# Altium PCB CHUVEIRO ECOLOGICO.PcbDoc
Units mil, origin at the board's own origin, x right, y up, seen from the top; angles counter-clockwise.
Board outline 3795 x 2780 mil, 2 copper layers (Top Layer, Bottom Layer); 36 components, 29 nets, 138 pads, 0 vias.
Unrouted connection lines stored in the file: 7.
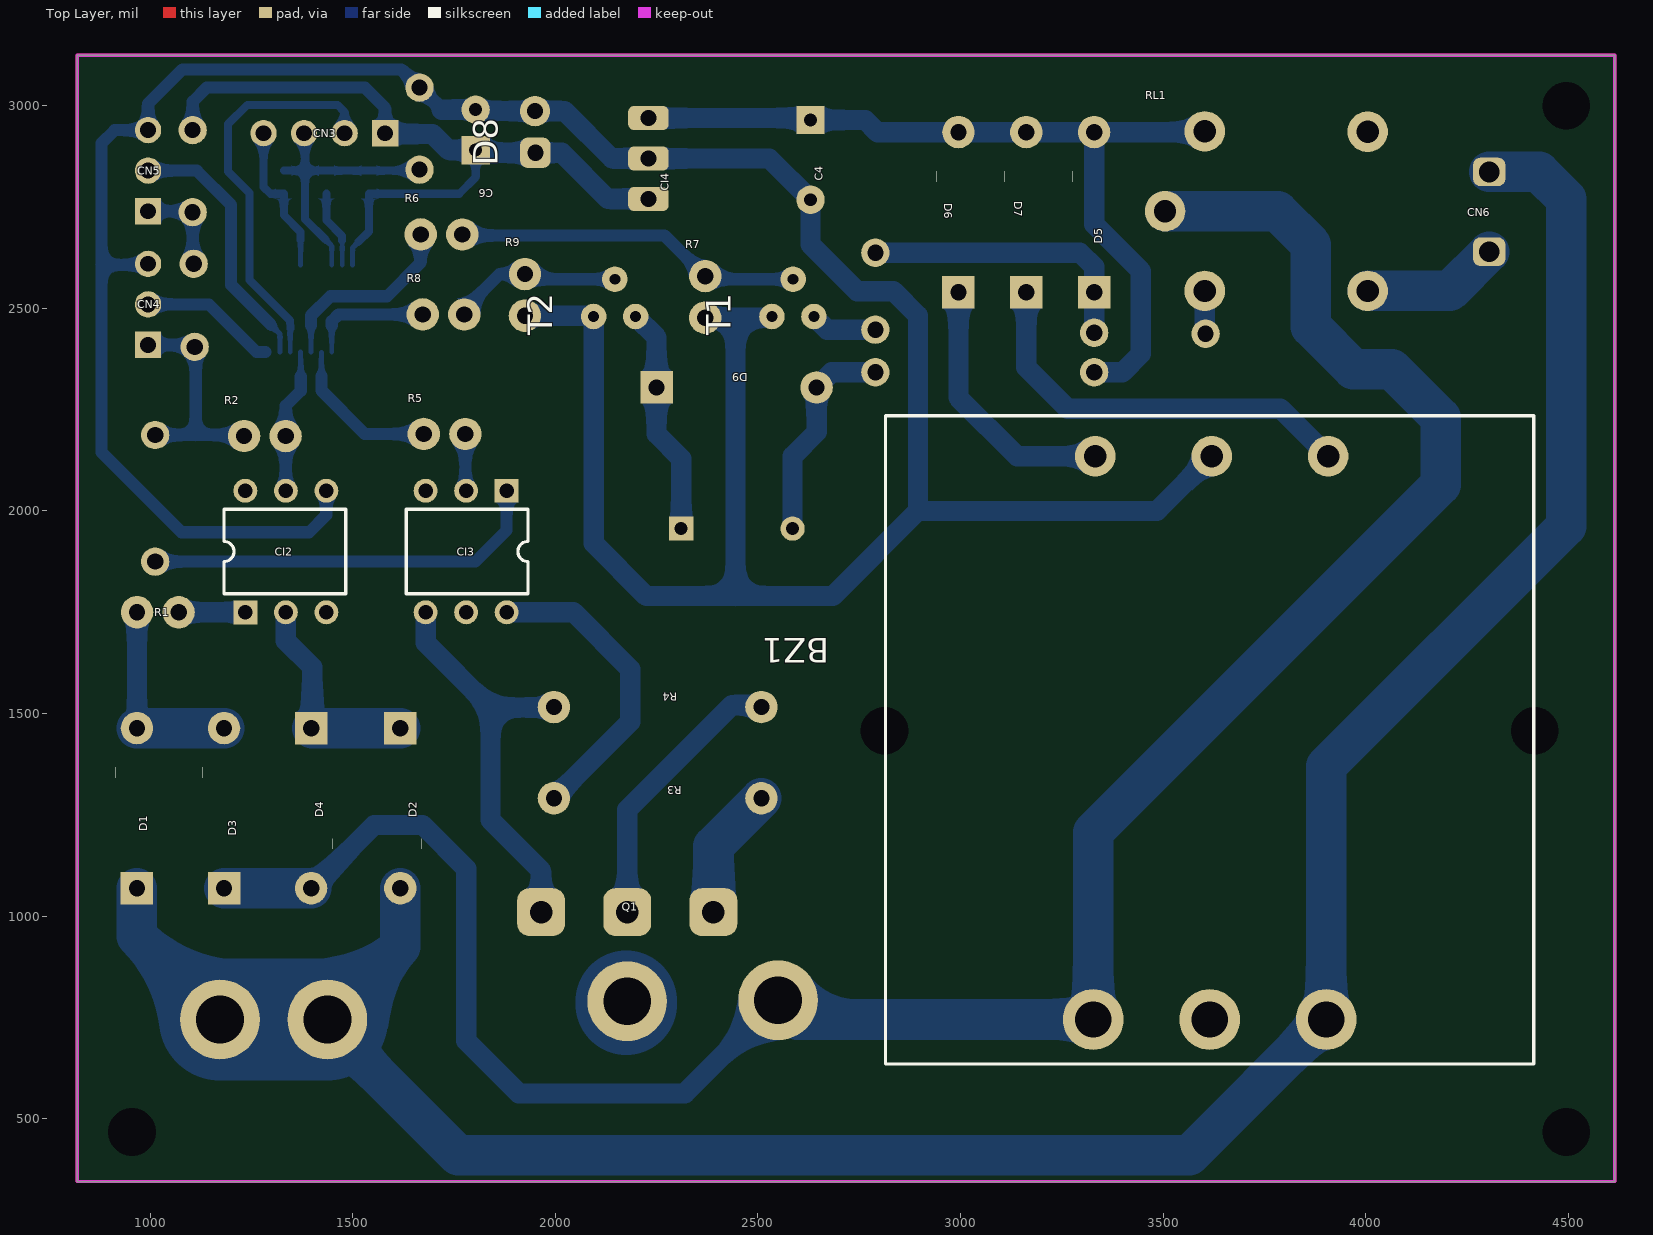
[diagram p0: Top Layer view]
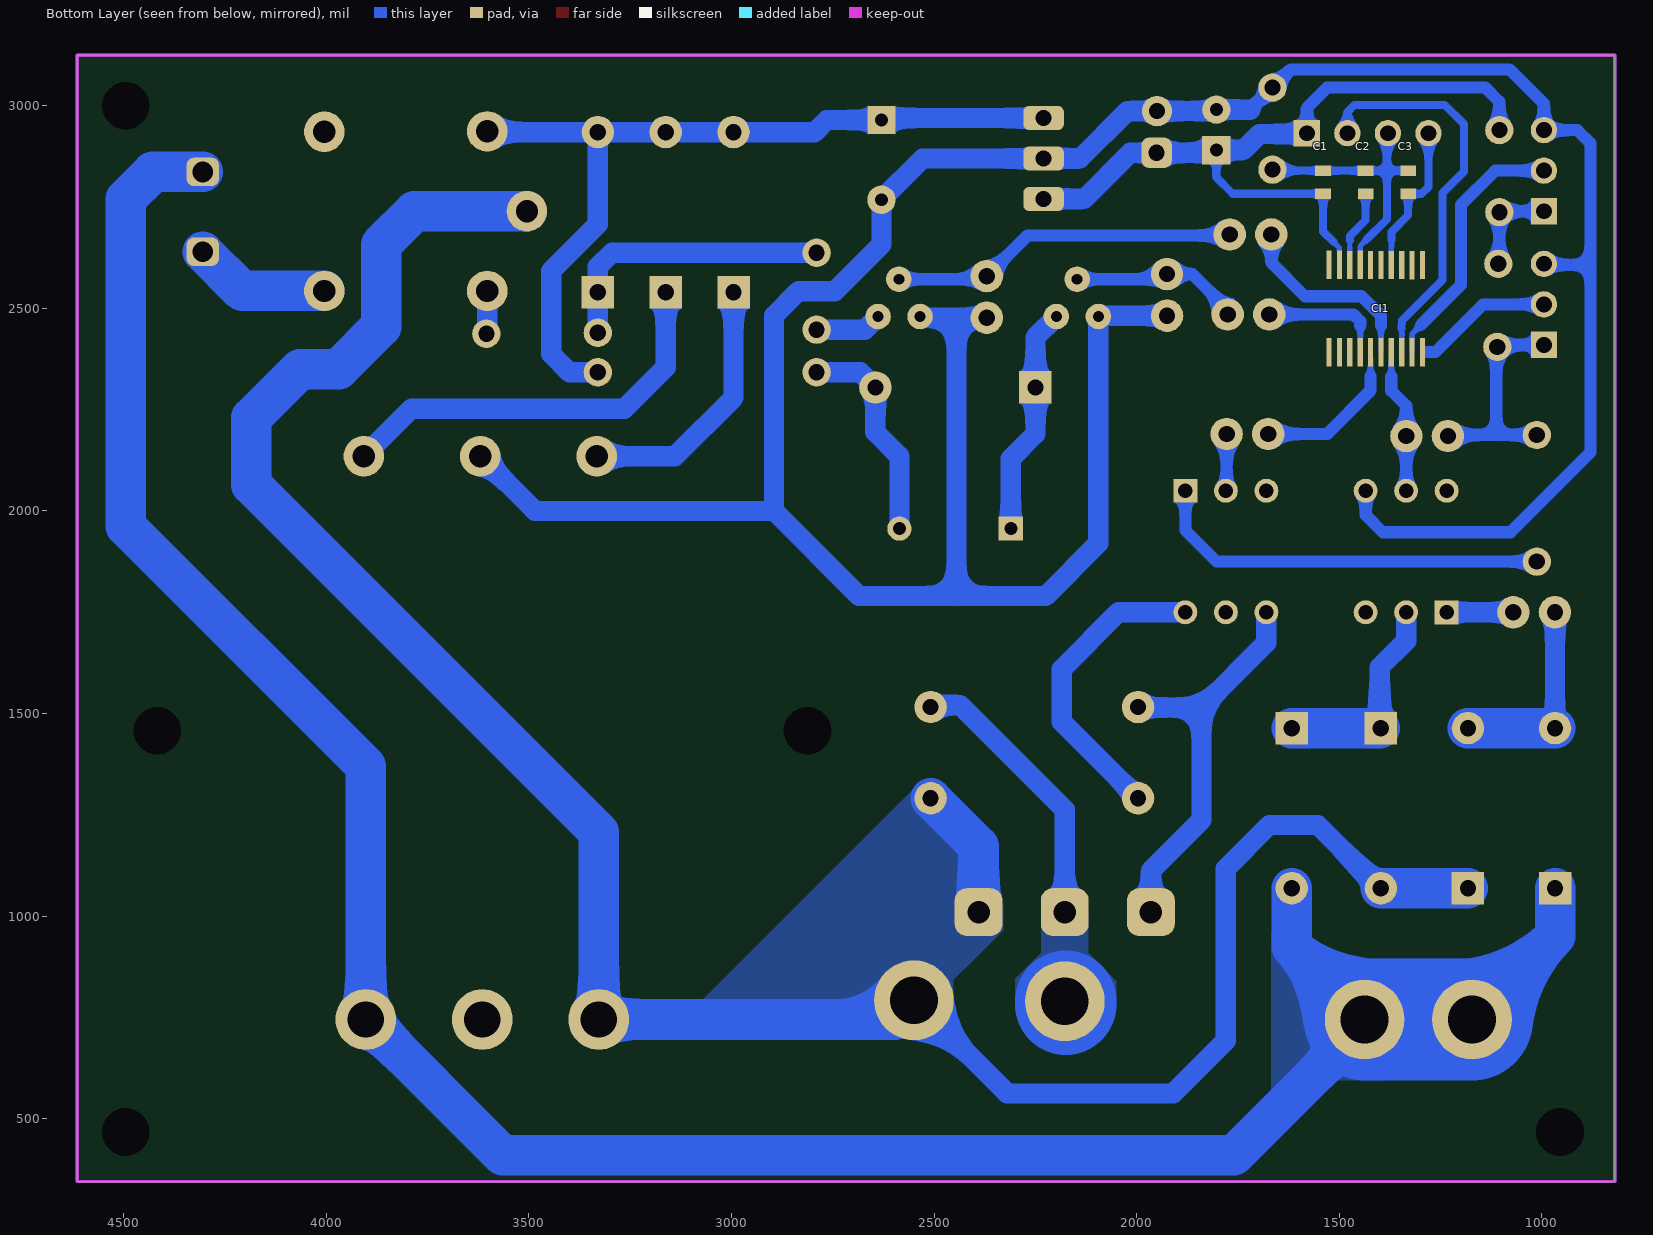
[diagram p1: Bottom Layer view, seen from below]
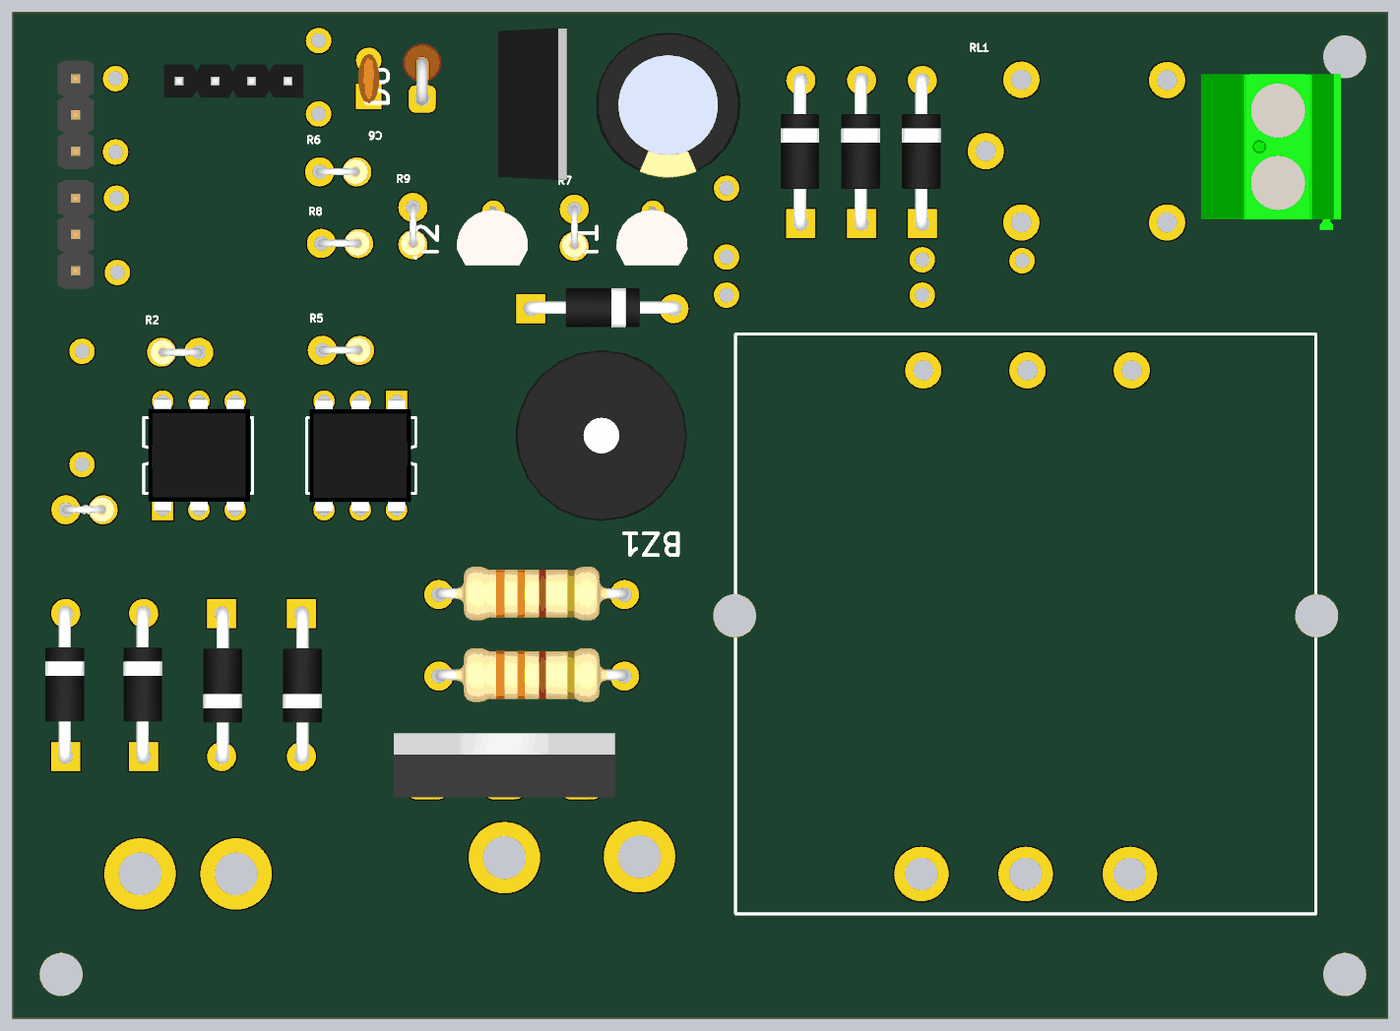
[diagram p2: 3D render of the assembled board from above, using the file's embedded part models]
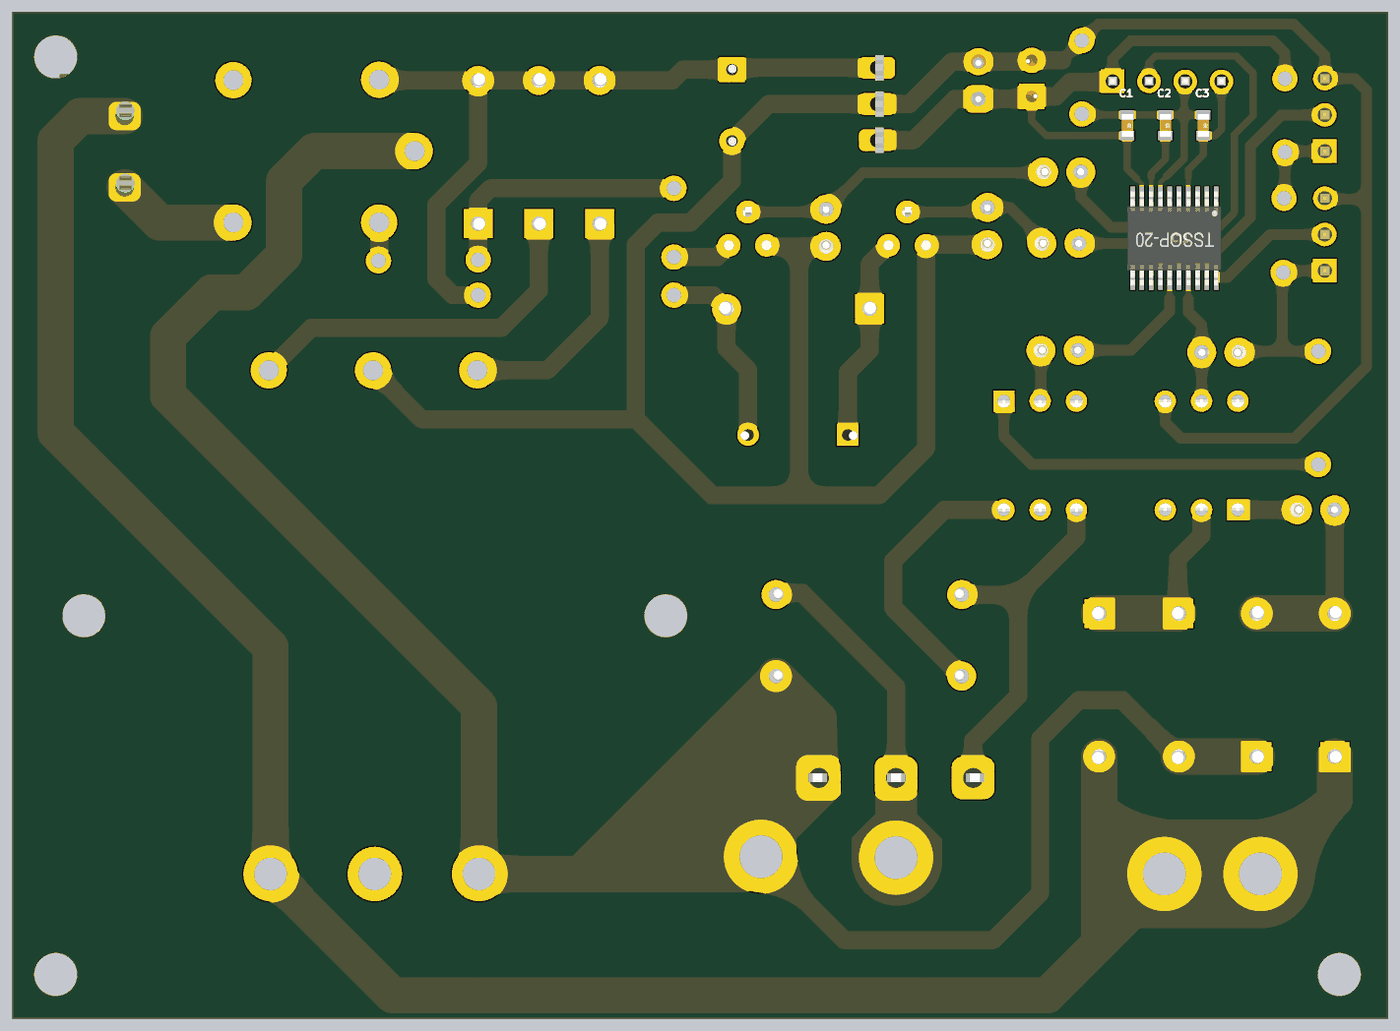
[diagram p3: 3D render of the assembled board from below, using the file's embedded part models]

## Layer stack, top to bottom
Top Layer: signal copper 1.4
Dielectric: dielectric 12.6, FR-4, Dk 4.8
Bottom Layer: signal copper 1.4

## Board outline
4195,3125 4615,3125 4615,345 820,345 820,3125

## Design rules (kind name [scope] priority, off if disabled: settings)
Clearance [All] p1: gap=10
PolygonConnect PolygonConnect_4 [All vs IsNamedPolygon('Top Layer-No Net')] p1: connectstyle=Direct reliefconductorwidth=10 reliefentries=4 polygonreliefangle="90 Angle"
PolygonConnect PolygonConnect_3 [All vs IsNamedPolygon('Top Layer-No Net')] p2: connectstyle=Direct reliefconductorwidth=10 reliefentries=4 polygonreliefangle="90 Angle"
PolygonConnect PolygonConnect_2 [All vs IsNamedPolygon('Top Layer-No Net')] p3: connectstyle=Direct reliefconductorwidth=10 reliefentries=4 polygonreliefangle="90 Angle"
PolygonConnect PolygonConnect_1 [All vs IsNamedPolygon('Top Layer-No Net')] p4: connectstyle=Direct reliefconductorwidth=10 reliefentries=4 polygonreliefangle="90 Angle"
PolygonConnect [All] p5: connectstyle=Relief reliefconductorwidth=10 reliefentries=4 polygonreliefangle="90 Angle"
RoutingVias [All] p1: holewidth=28 width=50 viastyle="Through Hole" minholewidth=28 minwidth=50 maxholewidth=28 maxwidth=50
SilkscreenOverComponentPads SilkToSolderMaskClearance [IsPad] p1: minsilkscreentomaskgap=10
SolderMaskExpansion [All] p1: expansion=4
Width [All] p1: maxlimit=300 minlimit=10 preferedwidth=12 minimp=50.000000 maximp=50.000000 favimp=50.000000
27 further rules are at their usual default settings.

## Components (designator, comment, footprint, x,y, rotation, side; value= is the part's Value field where it differs from the comment)
BZ1 "TDYY12-06" "BUZZER 12mm" 2310,1955 r180 top
C1 "C0603" C0603 1540,2840 r270 bottom
C2 "C0603" C0603 1435,2840 r270 bottom
C3 "C0603" C0603 1330,2840 r270 bottom
C4 "C_ELET_D10P5H20" C_ELET_D10P5H20 2630,2965 r90 top
C6 "C_ELET_2200uF" C_CERAMICO 1805,2890 r270 top
CI1 "CI_STM8S003F3_TSSOP20" TSSOP20 1410,2500 r270 bottom
CI2 "CI_4N25_DIL6" DIP6 1235,1750 r90 top
CI3 "CI_MOC3040_DIL6" DIP6 1880,2050 r270 top
CI4 "7805" CI_7805_TO220_V 2230,2970 r270 top
CN3 "CON_BP1X4_180" CON_BP1X4_180 1580,2932.5 r180 top
CN4 "CON_BP1X3_180" CON_BP1X3_180 995,2410 r90 top
CN5 "CON_BP1X3_180" CON_BP1X3_180 995,2740 r90 top
CN6 "CON_KRE_1X2" KRE_1X2 4305,2640 r90 top
D1 "1N400X" DO-35_1 967.5,1069 r90 top
D2 "1N400X" DO-35_1 1617.5,1464 r270 top
D3 "1N400X" DO-35_1 1182.5,1069 r90 top
D4 "1N400X" DO-35_1 1397.5,1464 r270 top
D5 "1N400X" DO-35_1 3330,2540 r90 top
D6 "1N400X" DO-35_1 2995,2540 r90 top
D7 "1N400X" DO-35_1 3162.5,2540 r90 top
D8 "DZ_1W_DO41" ZENNER_PE_4 1950,2890 r90 top
D9 "1N400X" DO-35_1 2250,2305 r0 top
Q1 "BT151" TOP-3 1965,1010 r0 top
R1 "R_CR25_1W" RES.5/1W_PE_2 967.5,1750 r90 top
R2 "R_CR25_1W" RES.5/1W_PE_2 1335,2185 r270 top
R3 "RES_1/4W_DIP" "RES 1/4W 330R" 2252.6,1290 r180 top
R4 "RES_1/4W_DIP" "RES 1/4W 330R" 2252.6,1515 r180 top
R5 "R_CR25_1W" RES.5/1W_PE_2 1675,2190 r90 top
R6 "R_CR25_1W" RES.5/1W_PE_2 1667.5,2682.5 r90 top
R7 "R_CR25_1W" RES.5/1W_PE_2 2370,2580 r0 top
R8 "R_CR25_1W" RES.5/1W_PE_2 1672.5,2485 r90 top
R9 "R_CR25_1W" RES.5/1W_PE_2 1925,2585 r0 top
RL1 "REL_NF_20A" REL_NF 3605,2540 r90 top
T1 "T_BC548" TO92_78L05 2515,2495 r90 top
T2 "T_BC548" TO92_78L05 2075,2495 r90 top

## Footprints (in the part's own frame and the unit in brackets; to place one, negate y for a bottom-side part, rotate by r counter-clockwise, add the part's x,y. Pads: shape width x height; smd on the part's side, far side on the other; paste and mask are expansions set on the pad)
"BUZZER 12mm" [mil] "BUZZER d12mm h10mm p7,5mm - TDYY12-06"
  round 60 hole 32: 1(-275.59,-1.62)
  rect 60x60 hole 32: 2(-0.66,-1.6)
  body extent -371,-236 101,236, height 472
C0603 [mil]
  rect 26x39 smd: 1(0,0) 2(57.05,0.02)
  body extent -3,-15 60,16, height 12
C_CERAMICO [mil]
  round 70 hole 32: 1(-100.61,-1.62)
  rect 70x70 hole 32: 2(-0.66,-1.6)
  body extent -119,-31 19,28, height 217
C_ELET_D10P5H20 [mil]
  round 70 hole 32: 1(-196.85,0)
  rect 70x70 hole 32: 2(0,0)
  body extent -298,-199 102,201, height 800
CI_7805_TO220_V [mil]
  rrect50% 60x100 hole 39: 1(0,-0.04) 2(200,-0.04) 3(100,-0.04)
  body extent -110,-70 310,120, height 837
CON_BP1X3_180 [mil]
  rect 65x65 hole 39: 1(0,0)
  round 65 hole 39: 2(100,0) 3(200,0)
  body extent -50,-50 250,50, height 326
CON_BP1X4_180 [mil]
  rect 65x65 hole 39: 1(0,0)
  round 65 hole 39: 2(100,0) 3(200,0) 4(300,0)
  body extent -42,-47 342,45, height 320
DIP6 [mm]
  rect 1.5x1.5 hole 0.9: 1(0,0)
  round 1.5 hole 0.9: 2(0,-2.54) 3(0,-5.08) 4(7.62,-5.08) 5(7.62,-2.54) 6(7.62,0)
  silkscreen extent 1.16,-6.3 6.46,1.34, body extent -0.1,-6.1 7.77,1.02, height 5.3
DO-35_1 [mil]
  rect 80x80 hole 40: 1(0,0)
  round 80 hole 40: 2(395,0)
  silkscreen extent 273,53 298,53, body extent -18,-51 416,56, height 107
KRE_1X2 [mil]
  rrect50% 70x80 hole 51.18: 1(0,0) 2(196.85,0)
  body extent -117,-179 312,207, height 559
REL_NF [mil]
  round 100 hole 55.12: 1(3,2) 2(397,2) 3(200,100) 4(395.98,-400) 5(3,-400)
  body extent -44,-464 444,146, height 551
"RES 1/4W 330R" [mil]
  round 80 hole 40: 1(-256.02,-1.06) 2(256.02,-1.04)
  body extent -265,-78 265,70, height 369
RES.5/1W_PE_2 [mil]
  round 80 hole 40: 1(0,-102.99) 2(0.2,-0.4)
  body extent -35,-135 36,9, height 262
TO92_78L05 [mm]
  round 1.6 hole 0.686: 1(-0.382,-3.132) 2(-0.381,-0.5) 3(1.956,-1.829)
  body extent -1.78,-4.26 2.33,0.74, height 11.5
TOP-3 [mm]
  rrect50% 3x3 hole 1.4: 1(0,0) 2(5.4,0) 3(10.8,0)
  body extent -2.37,-1.38 13.13,3.12, height 22.9
TSSOP20 [mil]
  rect 70x13 smd: 1(-106.97,115.16) 2(-106.94,89.56) 3(-106.97,63.98) 4(-107,38.39) 5(-107.25,12.8) 6(-107.04,-12.8) 7(-107.39,-38.39) 8(-107,-64.1) 9(-107.39,-89.69) 10(-107.39,-115.16) 11(107.96,-115.16) 12(107.96,-89.68) 13(108.36,-64.09) 14(107.96,-38.39) 15(108.04,-12.8) 16(108.02,12.8) 17(107.96,38.39) 18(107.93,63.98) 19(107.93,89.57) 20(108.01,115.14)
  body extent -129,-130 131,130, height 47
ZENNER_PE_4 [mil]
  rrect50% 75x75 hole 40: 1(-5.94,-0.85)
  round 75 hole 40: 2(97,0)
  body extent -22,-53 146,52, height 291

## Part data
BZ1: library part BZ_TDYY12-06, "BUZZER d12mm h10mm p7,5mm"
C1 C2 C3 CN3: "Capacitor"
C4: "Radial Polarized Capacitor"
C6: library part C_CERAMICO_
CI4: library part CI_7805_TO220_V
CN6: "Boardmount Pin Connector"
D1 D2 D3 D4 D5 D6 D7 D8 D9 R1 R2 R5 R6 R7 R8 R9: "Diode"
Q1: library part Q_BTA24-600B, "TRIAC"
R3 R4: library part "RES 1/4W 330R", "Resistor"
RL1: "RELE SIMPLES REVERSOR 20A"
T1 T2: "NPN Transistor"

## Free pads (board coordinates)
  round 196.85 hole 118.11: 0(1172.5,745) 0(1437.5,745) 0(2177.5,790) 0(2550,792.5)
  round 70 hole 40: 2(1012.5,1875) 2(1012.5,2187.5) 2(1105,2737.5) 2(1105,2940) 2(1107.5,2610) 2(1110,2405) 2(1665,2842.5) 2(1665,3045) 4(2790,2342.5) 4(2790,2447.5) 4(2790,2637.5) 4(3330,2342.5) 4(3330,2440) 4(3605,2437.5)
  round 100 hole 55: 2(3332.5,2135) 3(3907.5,2135) 4(3620,2135)
  round 150 hole 90: 2(3902.5,745) 3(3327.5,745) 4(3615,745)
  round 0 hole 118.11: 7(955,467.5) 7(2812.5,1457.5) 7(4417.5,1457.5) 7(4495,467.5) 7(4495,3000)

## Nets (pads, with @x,y where several pads share a name; then routed paths per layer and width w, separated by ;. In a path a pad name is that pad's centre, name@x,y a point inside that pad or via, vN(x,y) a via of type N, cw(c..) or ccw(c..) an arc to the next point about the centre after c; other vN are vias at no path point)
+5V_DIG: C1.2 C6.2 CI1.9 CI3.1 CI4.2 CN3.1 CN4.1 CN5.1 D8.1 pad.2@1012.5,1875 pad.2@1012.5,2187.5 pad.2@1105,2737.5 pad.2@1105,2940 pad.2@1107.5,2610 pad.2@1110,2405 R2.1 | length 3679.8
  Bottom Layer w12: CI1.9 1499.69,2649.69 1515,2665
  Bottom Layer w20: 1515,2665 1539.98,2689.98 C1.2 1762.95,2782.95 1803.4,2823.4 C6.2
  Bottom Layer w30: CN4.1 pad.2@1097.5,2410 ; CN5.1 1105,2740 pad.2@1105,2610 ; pad.2@1007.5,1875 1802.5,1875 1880,1952.5 CI3.1 ; pad.2@1012.5,2187.5 1112.5,2187.5 ; pad.2@1105,2940 1105,3010 1140,3045 1530,3045 1580,2995 CN3.1 ; pad.2@1112.5,2402.5 1112.5,2187.5 ; R2.1 1229.51,2187.5 1112.5,2187.5
  Bottom Layer w50: CN3.1 1581.89,2930.61 1696.89,2930.61 1736.84,2890.66 C6.2 1810.01,2884.06 D8.1 2015.94,2884.06 2130,2770 CI4.2
GND: 
GNDD: C1.1 C2.1 C3.1 C4.1 C6.1 CI1.7 CI2.4 CI4.3 CN3.3 CN4.3 CN5.3 D8.2 pad.2@1665,2842.5 pad.2@1665,3045 pad.4@3620,2135 R7.1 R9.1 T1.2 T2.2 | length 8491.6
  Bottom Layer w12: 1432.5,2670 1448.39,2654.11 CI1.7
  Bottom Layer w20: C3.1 1382.5,2840 ; CN3.3@1382.5,2932.5 1382.5,2840 ; 1432.5,2670 1382.5,2720 1382.5,2840 ; pad.2@1665,2842.5 1662.5,2840 C1.1 C2.1 1382.5,2840
  Bottom Layer w30: CN4.3@992.5,2607.5 880,2607.5 ; CI2.4 1435,1990 1392.5,1947.5 1077.5,1947.5 880,2145 880,2607.5 ; 1719.39,2990.61 1620,3090 1080,3090 995,3005 CN5.3 912.5,2940 880,2907.5 880,2607.5
  Bottom Layer w50: 1719.39,2990.61 C6.1 ; C6.1@1806.99,2987 D8.2 2023,2987 2140,2870 CI4.3 2528.15,2870 C4.1 2630,2657.5 2745,2542.5 2835,2542.5 2895,2482.5 2895,2000 ; R9.1 T2.2@2092.68,2482.01 ; T2.2 2094.68,1920.32 2225,1790 2445,1790 ; R7.1 2445,2477.01 ; T1.2@2531.69,2477.01 2445,2477.01 ; 3485,2000 2895,2000 ; 3490,2005 pad.4@3620,2135 ; 2445,1790 2685,1790 2895,2000 ; 2445,1790 2445,2477.01
NetBZ1_2: BZ1.2 D9.1 T2.1 | length 569.9
  Bottom Layer w50: T2.1 2250,2428.27 D9.1 2250,2190 2310.66,2129.34 BZ1.2
NetC2_2: C2.2 CI1.8 | length 192
  Bottom Layer w12: CI1.8 1474.1,2667.5
  Bottom Layer w20: C2.2 1434.98,2717.52 1473.69,2678.81 1473.69,2667.5
NetC3_2: C3.2 CI1.4 CN3.4 | length 382.7
  Bottom Layer w12: CI1.4 1371.61,2668.39
  Bottom Layer w20: CN3.4 1280,2800 1297.05,2782.95 C3.2 1329.98,2730.09 1371.61,2688.46 1371.61,2668.39
NetCI1_14: CI1.14 R8.2 | length 295.3
  Bottom Layer w12: CI1.14 1448.39,2457.5
  Bottom Layer w30: 1448.39,2457.5 1448.39,2468.39 1465.2,2485.2 R8.2@1660.4,2485.2
NetCI1_15: CI1.15 R5.2 | length 391.7
  Bottom Layer w12: 1422.8,2332.8 CI1.15
  Bottom Layer w30: 1422.8,2332.8 1422.8,2297.2 1529.8,2190.2 R5.2
NetCI1_16: CI1.16 R6.2 | length 487.2
  Bottom Layer w12: CI1.16 1397.2,2457.5
  Bottom Layer w30: 1397.2,2457.5 1397.2,2482.2 1445,2530 1585,2530 1667.5,2612.5 1667.5,2668.1 R6.2@1655.4,2680.2
NetCI1_17: CI1.17 CI2.5 R2.2 | length 357
  Bottom Layer w12: 1371.61,2331.61 CI1.17
  Bottom Layer w30: CI2.5@1334.6,2050.4 R2.2 1334.6,2259.6 1371.61,2296.61 1371.61,2331.61
NetCI1_18: CI1.18 CN3.2 | length 993
  Bottom Layer w12: CI1.18 1346.02,2450
  Bottom Layer w20: 1346.02,2450 1345,2470 1245,2570 1245,2785 1192.5,2837.5 1192.5,2955 1240,3002.5 1462.5,3002.5 1480,2985 CN3.2
NetCI1_19: CI1.19 CN5.2 | length 653.6
  Bottom Layer w12: 1297.5,2460 1320.43,2437.07 CI1.19 CI1.19@1320,2392.5
  Bottom Layer w30: CN5.2 1115,2840 1200,2755 1200,2557.5 1297.5,2460
NetCI1_20: CI1.20 CN4.2 | length 338.9
  Bottom Layer w30: CN4.2 1145,2510 1263.01,2391.99 1285,2391.99
NetCI2_1: CI2.1 R1.1 | length 164.5
  Bottom Layer w50: R1.1 CI2.1
NetCI2_2: CI2.2 D2.1 D4.1 | length 530.4
  Bottom Layer w50: CI2.2 1335,1680 1400,1615 D4.1@1400,1464
  Bottom Layer w100: D4.1@1400,1464 D2.1
NetCI3_2: CI3.2 R5.1 | length 138
  Bottom Layer w30: CI3.2@1777.99,2052.01 R5.1
NetCI3_4: CI3.4 Q1.1 R4.2 | length 1015.1
  Bottom Layer w50: CI3.4 1680,1675 1840,1515 ; Q1.1 1965,1112.5 1840,1237.5 1840,1515 ; R4.2 1995.54,1515 1840,1515
NetCI3_6: CI3.6 R3.2 | length 760
  Bottom Layer w50: CI3.6 2045,1750 2185,1610 2185,1479.46 R3.2
NetCN1_1: CN6.2 D1.1 D2.2 pad.0@1172.5,745 pad.0@1437.5,745 pad.2@3902.5,745 | length 6359.1
  Bottom Layer w50: pad.0@1437.5,667.57 pad.0@1442.5,672.57 ; pad.0@1442.5,667.57 pad.0@1467.5,692.57
  Bottom Layer w100: D1.1 967.5,950 pad.0@1172.5,745 ; D2.2 1617.5,925 1431.25,738.75 1760,410 3565,410 pad.2@3902.5,747.5 ; pad.2@3902.5,745 pad.2@3902.5,747.5 ; CN6.2 4428.15,2836.85 4495,2770 4495,1962.5 3902.5,1370 pad.2@3902.5,747.5
  Bottom Layer w300: pad.0@1172.5,745 pad.0@1437.5,745
NetCN1_2: D3.1 D4.2 pad.0@2550,792.5 pad.3@3327.5,745 Q1.3 R3.1 RL1.3 | length 6028.1
  Bottom Layer w50: D4.2 1553.5,1225 1672.5,1225 1780,1117.5 1780,692.5 1910,562.5 2320,562.5 pad.0@2550,792.5
  Bottom Layer w100: D3.1 D4.2 ; Q1.3 2390.2,1172.63 R3.1 ; pad.0@2550,792.5 2597.5,745 3327.5,745 3327.5,1207.5 4185,2065 4185,2230 4065,2350 3970,2350 3865,2455 3865,2657.5 3782.5,2740 RL1.3
NetCN2_2: pad.0@2177.5,790 Q1.2 R4.1 | length 693.2
  Bottom Layer w50: Q1.2 2177.6,1262.6 2436.06,1521.06 R4.1@2503.62,1521.06
  Bottom Layer w250: pad.0@2175,782.5 pad.0@2175,790
NetCN6_1: CN6.1 RL1.5 | length 340.2
  Bottom Layer w100: RL1.5 4208,2543 CN6.1
NetCON7_1: D6.1 pad.2@3332.5,2135 | length 657.6
  Bottom Layer w50: D6.1 2995,2280 3140,2135 pad.2@3332.5,2135
NetCON7_2: D7.1 pad.3@3907.5,2135 | length 1024.5
  Bottom Layer w50: D7.1@3170,2540 3162.5,2532.5 3162.5,2354.5 3264.5,2252.5 3790,2252.5 pad.3@3907.5,2135
NetD1_2: D1.2 D3.2 R1.2 | length 500.8
  Bottom Layer w50: D1.2@967.9,1464.4 R1.2
  Bottom Layer w100: D1.2 D3.2
NetD5_1: D5.1 pad.4@2790,2447.5 pad.4@2790,2637.5 pad.4@3330,2440 pad.4@3605,2437.5 RL1.1 T1.1 | length 978.1
  Bottom Layer w50: T1.1 2670.77,2447.5 pad.4@2790,2447.5 ; pad.4@2790,2637.5 3295,2637.5 3330,2602.5 D5.1 pad.4@3330,2440 ; pad.4@3603,2447 RL1.1
NetR6_1: R6.1 R7.2 T1.3 | length 863
  Bottom Layer w30: R6.1@1757.99,2680 2269.8,2680 R7.2 ; R7.2@2377.8,2572 T1.3
NetR8_1: R8.1 R9.2 T2.3 | length 412.7
  Bottom Layer w30: R8.1@1762.99,2485 1862.59,2584.6 R9.2 ; R9.2@1937.8,2572 T2.3
VCC: BZ1.1 C4.2 CI4.1 D5.2 D6.2 D7.2 D9.2 pad.4@2790,2342.5 pad.4@3330,2342.5 RL1.2 | length 2640.8
  Bottom Layer w50: CI4.1 C4.2@2625,2970 ; BZ1.1 2585.59,2135.59 2645,2195 D9.2 2682.5,2342.5 pad.4@2790,2342.5 ; C4.2 2765,2965 2795,2935 D6.2 D7.2 D5.2 ; pad.4@3330,2342.5 3400,2342.5 3445,2387.5 3445,2592.5 3330,2707.5 D5.2 ; RL1.2@3601,2935 D5.2
pads on no net: CI1.1 CI1.2 CI1.3 CI1.5 CI1.6 CI1.10 CI1.11 CI1.12 CI1.13 CI2.3 CI2.6 CI3.3 CI3.5 RL1.4

## Polygon pours and split planes (outlines as drawn)
NetCN1_1 on Bottom Layer "Top Layer-No Net" (solid, pour order 4): 1667.5,960 1667.5,545 1662.5,540 1632.5,510 1602.5,510 1517.5,595 1382.5,595 1382.5,880 1022.5,740 1022.5,895 1517.5,895 1582.5,960
NetCN2_2 on Bottom Layer "Top Layer-No Net" (solid, pour order 2): 2235,1010 2235,910 2280,865 2300,845 2300,770 2050,770 2050,840 2115,905 2120,910 2120,1010
NetCN1_2 on Bottom Layer "Top Layer-No Net" (solid, pour order 0): 2390,1070 2390,1190 2441.28,1223.72 2555,1310 2765,1100 3092.5,772.5 2905,760 2787.5,772.5 2642.5,760 2574.63,737.98 2452.5,797.5 2452.5,842.5 2402.5,892.5 2330,965 2330,1030

## Keep-outs
Keep-Out Layer:
  lines w1: 4615,380 4615,3125
  lines w7.87: 820,345 4615,345 4615,3125 820,3125 820,345

## Other copper
Multi-Layer:
  lines w7.87: 820,345 4615,345 4615,3125 820,3125 820,345

## Silkscreen, mask and mechanical layers (free items; w line width, h text height)
Top Overlay:
  lines w7.87: 2815,635 2815,2235 4415,2235 4415,635 2815,635

## Text inside footprints (layer, text, board x,y; h text height)
D8: Mechanical 1 "K" at 2051.27,2892.6 h37.5 r90